# EAGLE board 24x16_RGB_ATXMega_cp (EAGLE 6.5.0), part 1 of 2
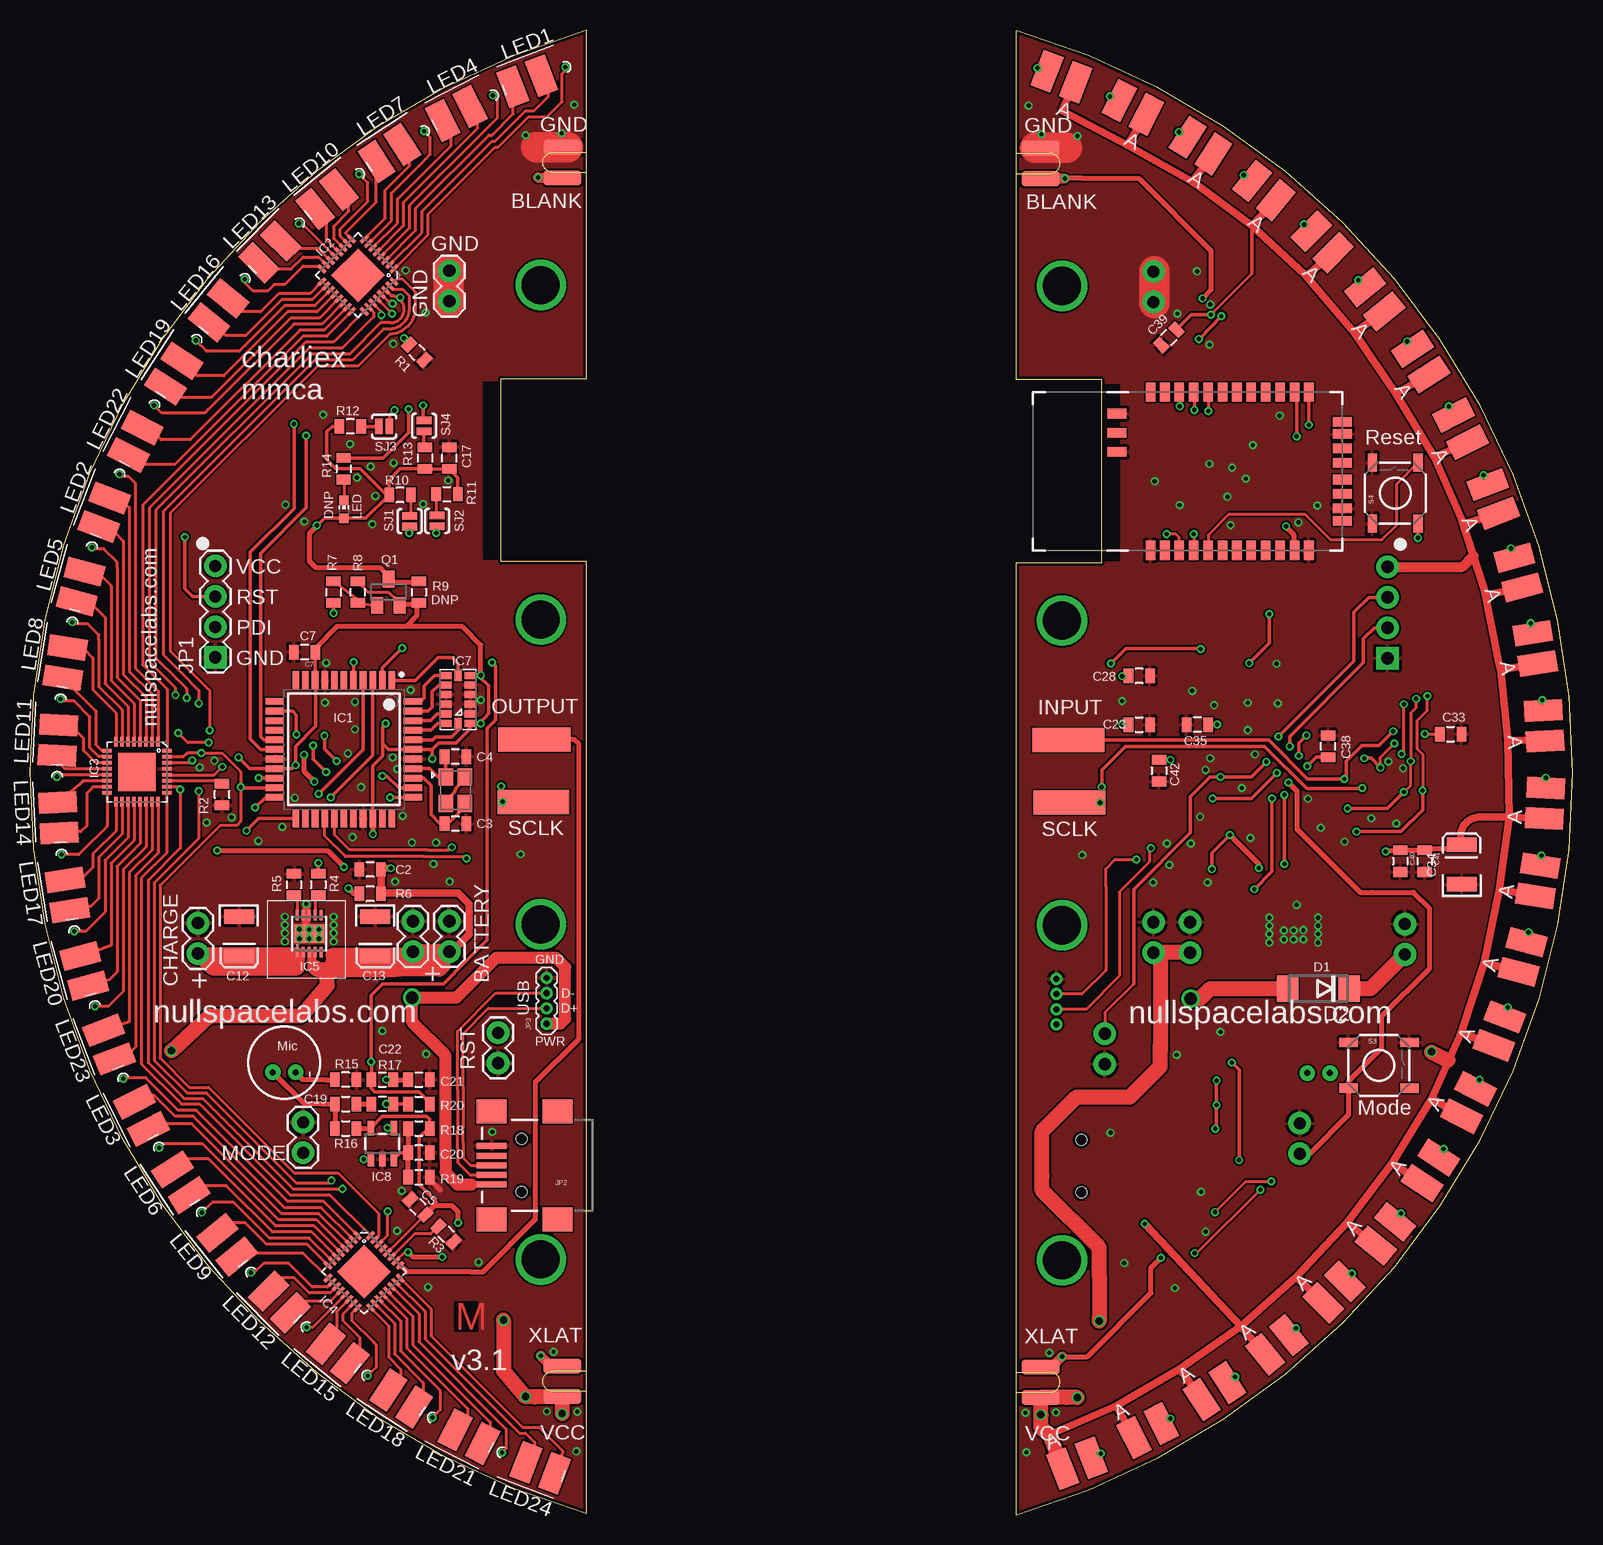
[diagram p0: board, top side]
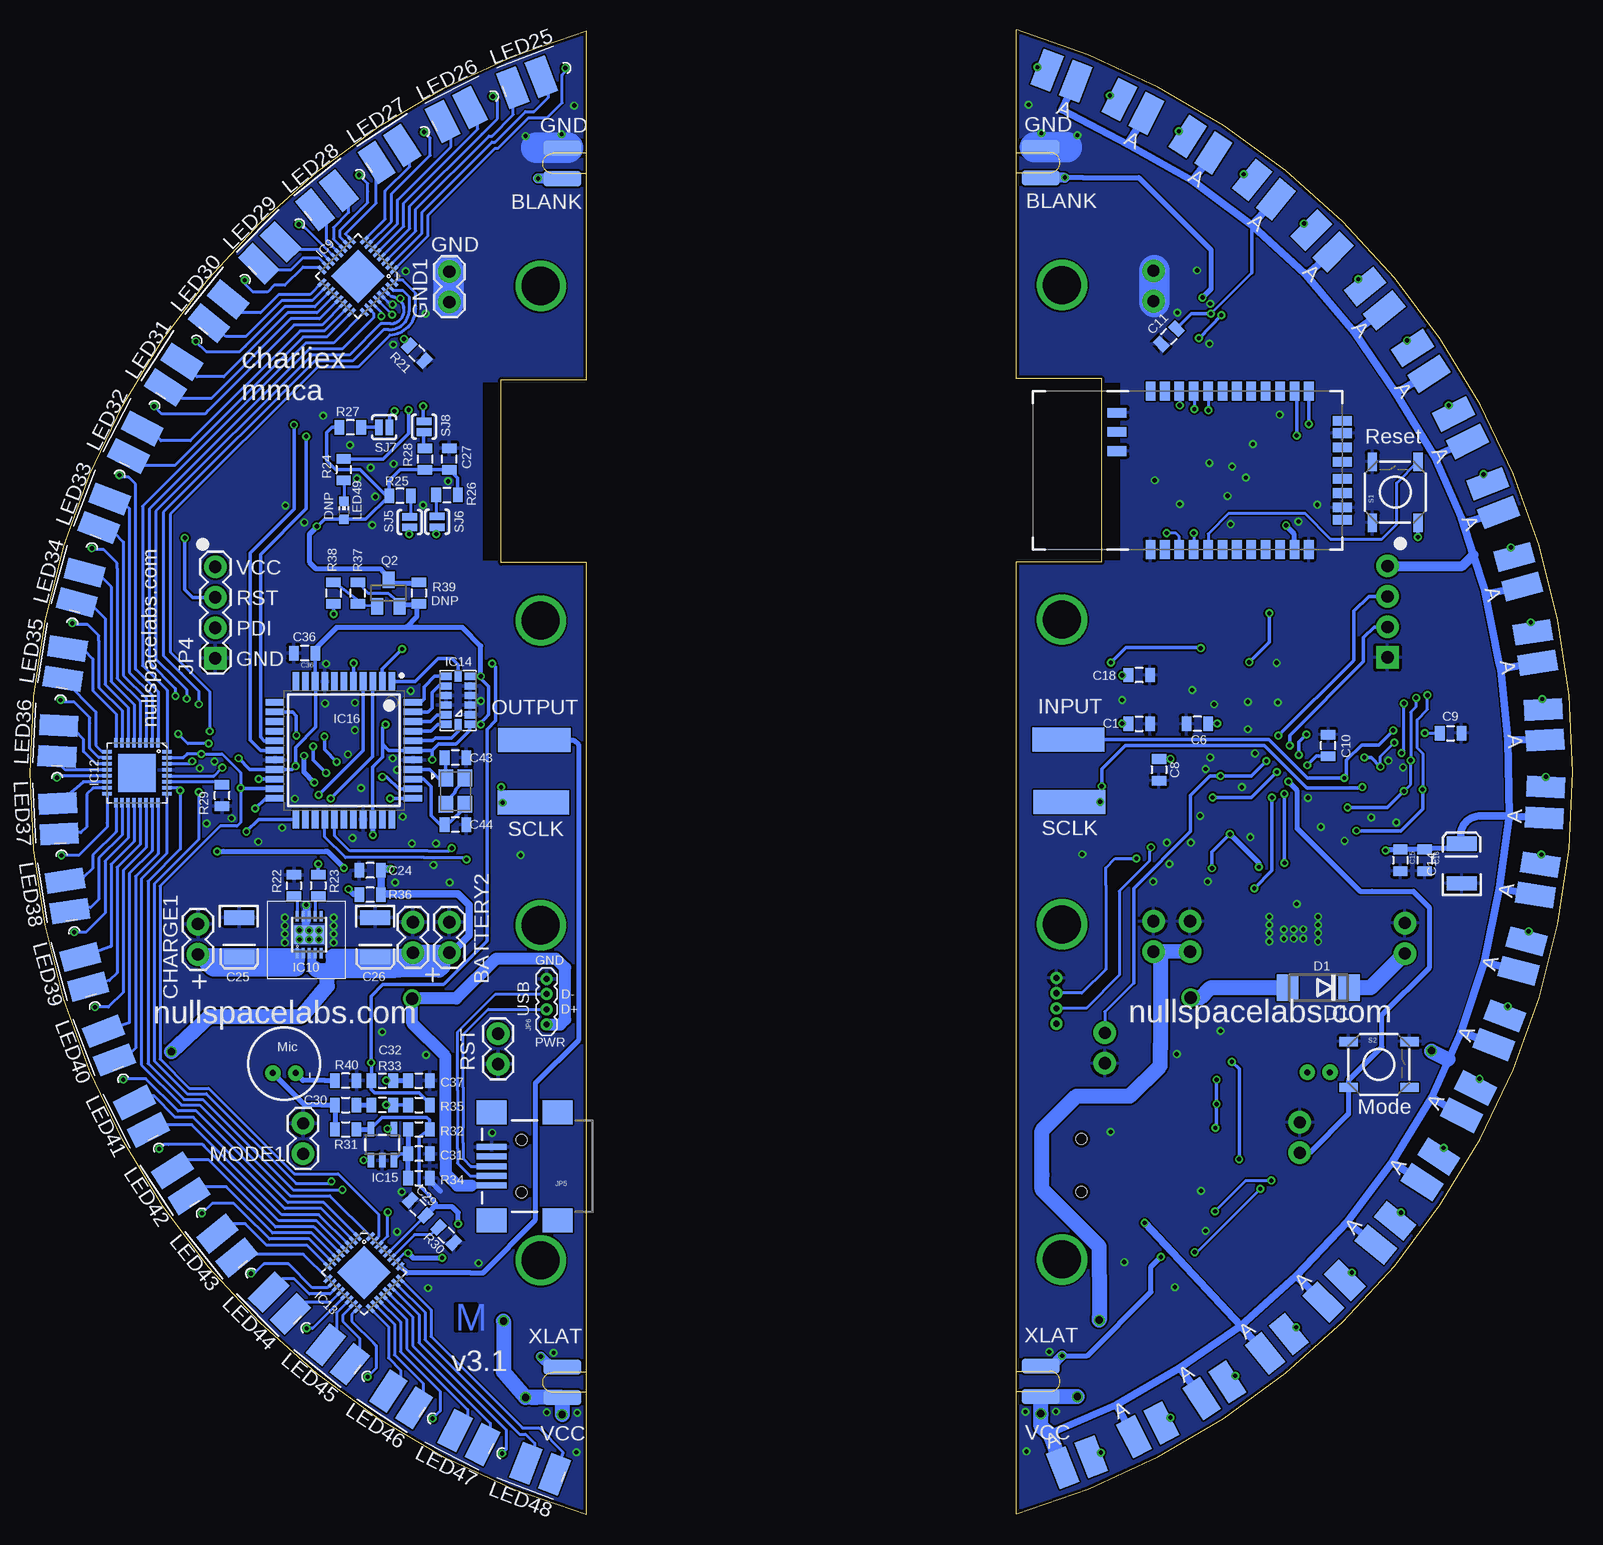
[diagram p1: board, bottom side, seen from below]

Size 128.61 x 123.77 mm. Coordinates in mm from the lower left corner, seen from the top.
Outline: 46.39,0.08 arc-147 46.39,123.77 46.39,94.69 39.27,94.69 39.27,79.45 46.39,79.45 46.39,0.08
Outline: 82.23,0 arc147 82.23,123.7 82.23,94.62 89.34,94.62 89.34,79.38 82.23,79.38 82.23,0
Copper layers (1*16): Top 0.035mm / dielectric 1.5mm / Bottom 0.035mm
Design rules "ITEADstudio_DRC": minimum track width 6mil, minimum drill 12mil, track to track 6mil, track to pad 6mil, pad to pad 6mil, via to via 6mil, smd to smd 0mil, copper to edge 10mil, drill to drill 10mil, minimum pad ring 10mil, minimum via ring 6mil, stop-mask expansion 2mil, vias tented up to drill 100mil, thermal gap 10mil

## Footprints (pad centres in the part's own frame; a part is rotated, then mirrored left to right if it is on the bottom)
1X02 = drill 1.016 pad 1.88: 1 0,0; 2 2.54,0
0805 = smd 0.8 x 1.2: 1 -0.9,0; 2 0.9,0
EIA3528 = smd 1.2 x 2.5: A 1.65,0; C -1.65,0
DO214AA = smd 1.8 x 2.2: A 2.55,0; C -2.55,0
NONOLITH_TQFP-44 = smd 1.55 x 0.55: 1 -5.75,4; 2 -5.75,3.2; 3 -5.75,2.4; 4 -5.75,1.6; 5 -5.75,0.8; 6 -5.75,0; 7 -5.75,-0.8; 8 -5.75,-1.6; 9 -5.75,-2.4; 10 -5.75,-3.2; 11 -5.75,-4; 23 5.75,-4; 24 5.75,-3.2; 25 5.75,-2.4; 26 5.75,-1.6; 27 5.75,-0.8; 28 5.75,0; 29 5.75,0.8; 30 5.75,1.6; 31 5.75,2.4; 32 5.75,3.2; 33 5.75,4 | smd 0.55 x 1.55: 12 -4,-5.75; 13 -3.2,-5.75; 14 -2.4,-5.75; 15 -1.6,-5.75; 16 -0.8,-5.75; 17 0,-5.75; 18 0.8,-5.75; 19 1.6,-5.75; 20 2.4,-5.75; 21 3.2,-5.75; 22 4,-5.75; 34 4,5.75; 35 3.2,5.75; 36 2.4,5.75; 37 1.6,5.75; 38 0.8,5.75; 39 0,5.75; 40 -0.8,5.75; 41 -1.6,5.75; 42 -2.4,5.75; 43 -3.2,5.75; 44 -4,5.75
QFN32_XLP = smd 0.285 x 0.8: 1 -1.75,-2.5; 2 -1.25,-2.5; 3 -0.75,-2.5; 4 -0.25,-2.5; 5 0.25,-2.5; 6 0.75,-2.5; 7 1.25,-2.5; 8 1.75,-2.5; 17 1.75,2.5; 18 1.25,2.5; 19 0.75,2.5; 20 0.25,2.5; 21 -0.25,2.5; 22 -0.75,2.5; 23 -1.25,2.5; 24 -1.75,2.5 | smd 0.8 x 0.285: 9 2.5,-1.75; 10 2.5,-1.25; 11 2.5,-0.75; 12 2.5,-0.25; 13 2.5,0.25; 14 2.5,0.75; 15 2.5,1.25; 16 2.5,1.75; 25 -2.5,1.75; 26 -2.5,1.25; 27 -2.5,0.75; 28 -2.5,0.25; 29 -2.5,-0.25; 30 -2.5,-0.75; 31 -2.5,-1.25; 32 -2.5,-1.75 | smd 3.15 x 3.15: EP 0,0
DFN10_3X3 = smd 0.3 x 0.85: 1 -1,-1.55; 2 -0.5,-1.55; 3 0,-1.55; 4 0.5,-1.55; 5 1,-1.55; 6 1,1.55; 7 0.5,1.55; 8 0,1.55; 9 -0.5,1.55; 10 -1,1.55 | smd 2.48 x 1.55: EXP 0,0
RN41 = smd 0.8 x 1.6: 1 -6.6,-6.6; 2 -5.4,-6.6; 3 -4.2,-6.6; 4 -3,-6.6; 5 -1.8,-6.6; 6 -0.6,-6.6; 7 0.6,-6.6; 8 1.8,-6.6; 9 3,-6.6; 10 4.2,-6.6; 11 5.4,-6.6; 12 6.6,-6.6; 13 6.6,6.6; 14 5.4,6.6; 15 4.2,6.6; 16 3,6.6; 17 1.8,6.6; 18 0.6,6.6; 19 -0.6,6.6; 20 -1.8,6.6; 21 -3,6.6; 22 -4.2,6.6; 23 -5.4,6.6; 24 -6.6,6.6 | smd 1.6 x 0.8: 25 -9.4,4.8; 26 -9.4,3.2; 27 -9.4,1.6; 28 9.4,3.1; 29 9.4,-3.1; 30 9.4,-4.122; 31 9.4,-1.9; 32 9.4,-0.7; 33 9.4,0.7; 34 9.4,1.9; 35 9.4,4.122
LGA-14 = smd 0.6 x 0.9: 1 -2,-1; 2 -1.2,-1; 3 -0.4,-1; 4 0.4,-1; 5 1.2,-1; 6 2,-1; 8 2,1; 9 1.2,1; 10 0.4,1; 11 -0.4,1; 12 -1.2,1; 13 -2,1 | smd 0.9 x 0.6: 7 2,0; 14 -2,0
SOT23-5 = smd 0.55 x 1.2: 1 -0.95,-1.3; 2 0,-1.3; 3 0.95,-1.3; 4 0.95,1.3; 5 -0.95,1.3
1X04 = drill 1.016 pad 1.88 square: 1 0,0 | drill 1.016 pad 1.88: 2 2.54,0; 3 5.08,0; 4 7.62,0
USB-MINIB = smd 2.5 x 0.5: D+ 2.5,0; D- 2.5,0.8; GND 2.5,-1.6; ID 2.5,-0.8; VBUS 2.5,1.6 | smd 2.5 x 2: MTN1 -3,4.5; MTN2 2.5,4.5; MTN3 -3,-4.5; MTN4 2.5,-4.5 | hole 0.9: 0,2.2; 0,-2.2
1X04-1.27MM = drill 0.508 pad 1: 1 0,0; 2 1.27,0; 3 2.54,0; 4 3.81,0
CHIP-LED0603 = smd 0.8 x 0.8: A 0,-0.75; C 0,0.75
LED5MM_RGB_EDGE = smd 1.75 x 3.175 bottom: A -0.585,-1.6; B 1.971,-1.6 | smd 1.75 x 3.175: G 0.693,-1.6; R -1.863,-1.6
MIC-6MM = drill 0.5 pad 1.27: 1 -0.8,0.95; 2 -0.8,-0.95
SOT23 = smd 1 x 1.4: 1 -0.95,-1.1; 2 0.95,-1.1; 3 0,1.1
TACTILE_SWITCH_SMD = smd 1.524 x 0.762: 1 -2.54,1.905; 2 2.54,1.905; 3 -2.54,-1.905; 4 2.54,-1.905
SJ_2S-NO = smd 0.635 x 1.27: 1 -0.45,0; 2 0.45,0
SLOT = smd 3.175 x 1.27: P$1 2.032,1.27; P$2 2.032,-1.27 | smd 3.175 x 1.27 bottom: P$3 2.032,1.27; P$4 2.032,-1.27
TP20SQ = smd 2 x 2: TP 0,0
NX3225GA = smd 1.4 x 1.2: 1 -1.1,-0.8; 2 1.1,-0.8; 3 1.1,0.8; 4 -1.1,0.8

## Placement (x,y rotation side)
BATTERY  [1X02]  31.91,49.48 270 top
BATTERY1  [1X02]  34.96,49.48 270 top
BATTERY2  [1X02]  96.7,49.4 270 bottom
BATTERY3  [1X02]  93.66,49.4 270 bottom
C1  .1uF  [0805]  36.15,65.94 0 bottom
C2  .1uF  [0805]  28.35,53.8 180 top
C3  10pF  [0805]  35.46,57.61 180 top
C4  10pF  [0805]  35.46,63.2 180 top
C5  .1uF  [0805]  32.34,25.66 135 top
C6  .1uF  [0805]  31.3,65.94 180 bottom
C7  .1uF  [0805]  22.89,71.91 180 top
C8  0.1uF  [0805]  34.5,62.1 270 bottom
C9  .1uF  [0805]  10.19,65.15 0 bottom
C10  .1uF  [0805]  20.4,64.13 90 bottom
C11  .1uF  [0805]  33.68,98.23 225 bottom
C12  4.7uF  [EIA3528]  17.43,48.21 270 top
C13  4.7uF  [EIA3528]  28.78,48.21 270 top
C14  47uF  [EIA3528]  9.28,54.28 90 bottom
C15  10uF  [0805]  14.38,54.56 270 bottom
C16  1uF  [0805]  12.35,54.56 270 bottom
C17  .1uF  [0805]  34.95,88.08 90 top
C18  0.1uF  [0805]  36.15,70 180 bottom
C19  4.7uF  [0805]  26.32,34.24 0 top
C20  1uF  [0805]  32.42,30.18 180 top
C21  .1uF  [0805]  32.42,36.27 0 top
C22  12pF  [0805]  29.37,36.27 0 top
C23  .1uF  [0805]  92.46,65.86 0 top
C24  .1uF  [0805]  100.26,53.72 180 bottom
C25  4.7uF  [EIA3528]  111.18,48.13 270 bottom
C26  4.7uF  [EIA3528]  99.83,48.13 270 bottom
C27  .1uF  [0805]  93.66,88.01 90 bottom
C28  0.1uF  [0805]  92.46,69.93 180 top
C29  .1uF  [0805]  96.28,25.59 135 bottom
C30  4.7uF  [0805]  102.29,34.16 0 bottom
C31  1uF  [0805]  96.2,30.1 180 bottom
C32  12pF  [0805]  99.24,36.19 0 bottom
C33  .1uF  [0805]  118.42,65.07 0 top
C34  47uF  [EIA3528]  119.34,54.2 90 top
C35  .1uF  [0805]  97.31,65.86 180 top
C36  .1uF  [0805]  105.72,71.83 180 bottom
C37  .1uF  [0805]  96.2,36.19 0 bottom
C38  .1uF  [0805]  108.21,64.06 90 top
C39  .1uF  [0805]  94.93,98.15 225 top
C40  10uF  [0805]  114.23,54.48 270 top
C41  1uF  [0805]  116.26,54.48 270 top
C42  0.1uF  [0805]  94.11,62.03 270 top
C43  10pF  [0805]  93.15,63.12 180 bottom
C44  10pF  [0805]  93.15,57.53 180 bottom
CHARGE  [1X02]  14,49.33 270 top
CHARGE1  [1X02]  114.61,49.25 270 bottom
D1  SSB44-E3/52T  [DO214AA]  21.22,43.94 180 bottom
D2  SSB44-E3/52T  [DO214AA]  107.4,43.87 180 top
GND  [1X02]  34.96,101.17 90 top
GND1  [1X02]  93.66,101.09 90 bottom
IC1  [NONOLITH_TQFP-44]  26.17,63.8 270 top
IC2  TLC5947XLP  [QFN32_XLP]  27.34,103.33 135 top
IC3  TLC5947XLP  [QFN32_XLP]  8.92,61.93 180 top
IC4  TLC5947XLP  [QFN32_XLP]  27.84,20.27 225 top
IC5  MCP73123  [DFN10_3X3]  23.27,48.44 0 top
IC6  BLUETOOTH-RN41"  [RN41]  28.61,87.07 0 bottom
IC7  MMA7455L  [LGA-14]  35.69,67.97 90 top
IC8  OPA344  [SOT23-5]  29.37,30.94 0 top
IC9  TLC5947XLP  [QFN32_XLP]  101.28,103.25 135 bottom
IC10  MCP73123  [DFN10_3X3]  105.34,48.36 0 bottom
IC11  BLUETOOTH-RN41"  [RN41]  100.01,87 0 top
IC12  TLC5947XLP  [QFN32_XLP]  119.69,61.85 180 bottom
IC13  TLC5947XLP  [QFN32_XLP]  100.77,20.19 225 bottom
IC14  MMA7455L  [LGA-14]  92.92,67.89 90 bottom
IC15  OPA344  [SOT23-5]  99.24,30.86 0 bottom
IC16  [NONOLITH_TQFP-44]  102.44,63.73 270 bottom
JP1  [1X04]  15.45,71.48 90 top
JP2  USBSMD  [USB-MINIB]  40.98,29.13 180 top
JP3  [1X04-1.27MM]  43.06,40.94 90 top
JP4  [1X04]  113.16,71.4 90 bottom
JP5  USBSMD  [USB-MINIB]  87.64,29.06 180 bottom
JP6  [1X04-1.27MM]  85.55,40.87 90 bottom
LED  [CHIP-LED0603]  26.17,83.82 0 top
LED1  GM1WA55311A5MM_RGB_EDGE  [LED5MM_RGB_EDGE]  41.41,121.21 21 top
LED2  GM1WA55311A5MM_RGB_EDGE  [LED5MM_RGB_EDGE]  4.91,84.68 69 top
LED3  GM1WA55311A5MM_RGB_EDGE  [LED5MM_RGB_EDGE]  7.59,33.1 117 top
LED4  GM1WA55311A5MM_RGB_EDGE  [LED5MM_RGB_EDGE]  35.34,118.5 27 top
LED5  GM1WA55311A5MM_RGB_EDGE  [LED5MM_RGB_EDGE]  2.83,78.36 75 top
LED6  GM1WA55311A5MM_RGB_EDGE  [LED5MM_RGB_EDGE]  10.91,27.34 123 top
LED7  GM1WA55311A5MM_RGB_EDGE  [LED5MM_RGB_EDGE]  29.58,115.18 33 top
LED8  GM1WA55311A5MM_RGB_EDGE  [LED5MM_RGB_EDGE]  1.45,71.86 81 top
LED9  GM1WA55311A5MM_RGB_EDGE  [LED5MM_RGB_EDGE]  14.82,21.96 129 top
LED10  GM1WA55311A5MM_RGB_EDGE  [LED5MM_RGB_EDGE]  24.21,111.27 39 top
LED11  GM1WA55311A5MM_RGB_EDGE  [LED5MM_RGB_EDGE]  0.75,65.25 87 top
LED12  GM1WA55311A5MM_RGB_EDGE  [LED5MM_RGB_EDGE]  19.26,17.02 135 top
LED13  GM1WA55311A5MM_RGB_EDGE  [LED5MM_RGB_EDGE]  19.26,106.83 45 top
LED14  GM1WA55311A5MM_RGB_EDGE  [LED5MM_RGB_EDGE]  0.75,58.6 93 top
LED15  GM1WA55311A5MM_RGB_EDGE  [LED5MM_RGB_EDGE]  24.21,12.58 141 top
LED16  GM1WA55311A5MM_RGB_EDGE  [LED5MM_RGB_EDGE]  14.84,101.86 51 top
LED17  GM1WA55311A5MM_RGB_EDGE  [LED5MM_RGB_EDGE]  1.45,51.99 99 top
LED18  GM1WA55311A5MM_RGB_EDGE  [LED5MM_RGB_EDGE]  29.58,8.67 147 top
LED19  GM1WA55311A5MM_RGB_EDGE  [LED5MM_RGB_EDGE]  10.96,96.48 57 top
LED20  GM1WA55311A5MM_RGB_EDGE  [LED5MM_RGB_EDGE]  2.83,45.49 105 top
LED21  GM1WA55311A5MM_RGB_EDGE  [LED5MM_RGB_EDGE]  35.34,5.35 153 top
LED22  GM1WA55311A5MM_RGB_EDGE  [LED5MM_RGB_EDGE]  7.61,90.73 63 top
LED23  GM1WA55311A5MM_RGB_EDGE  [LED5MM_RGB_EDGE]  4.88,39.17 111 top
LED24  GM1WA55311A5MM_RGB_EDGE  [LED5MM_RGB_EDGE]  41.41,2.64 159 top
LED25  GM1WA55311A5MM_RGB_EDGE  [LED5MM_RGB_EDGE]  87.2,121.13 21 bottom
LED26  GM1WA55311A5MM_RGB_EDGE  [LED5MM_RGB_EDGE]  93.28,118.43 27 bottom
LED27  GM1WA55311A5MM_RGB_EDGE  [LED5MM_RGB_EDGE]  99.03,115.11 33 bottom
LED28  GM1WA55311A5MM_RGB_EDGE  [LED5MM_RGB_EDGE]  104.41,111.2 39 bottom
LED29  GM1WA55311A5MM_RGB_EDGE  [LED5MM_RGB_EDGE]  109.35,106.75 45 bottom
LED30  GM1WA55311A5MM_RGB_EDGE  [LED5MM_RGB_EDGE]  113.77,101.79 51 bottom
LED31  GM1WA55311A5MM_RGB_EDGE  [LED5MM_RGB_EDGE]  117.65,96.41 57 bottom
LED32  GM1WA55311A5MM_RGB_EDGE  [LED5MM_RGB_EDGE]  121,90.65 63 bottom
LED33  GM1WA55311A5MM_RGB_EDGE  [LED5MM_RGB_EDGE]  123.7,84.6 69 bottom
LED34  GM1WA55311A5MM_RGB_EDGE  [LED5MM_RGB_EDGE]  125.78,78.28 75 bottom
LED35  GM1WA55311A5MM_RGB_EDGE  [LED5MM_RGB_EDGE]  127.16,71.78 81 bottom
LED36  GM1WA55311A5MM_RGB_EDGE  [LED5MM_RGB_EDGE]  127.86,65.17 87 bottom
LED37  GM1WA55311A5MM_RGB_EDGE  [LED5MM_RGB_EDGE]  127.86,58.53 93 bottom
LED38  GM1WA55311A5MM_RGB_EDGE  [LED5MM_RGB_EDGE]  127.16,51.92 99 bottom
LED39  GM1WA55311A5MM_RGB_EDGE  [LED5MM_RGB_EDGE]  125.78,45.42 105 bottom
LED40  GM1WA55311A5MM_RGB_EDGE  [LED5MM_RGB_EDGE]  123.73,39.09 111 bottom
LED41  GM1WA55311A5MM_RGB_EDGE  [LED5MM_RGB_EDGE]  121.02,33.02 117 bottom
LED42  GM1WA55311A5MM_RGB_EDGE  [LED5MM_RGB_EDGE]  117.7,27.26 123 bottom
LED43  GM1WA55311A5MM_RGB_EDGE  [LED5MM_RGB_EDGE]  113.8,21.89 129 bottom
LED44  GM1WA55311A5MM_RGB_EDGE  [LED5MM_RGB_EDGE]  109.35,16.95 135 bottom
LED45  GM1WA55311A5MM_RGB_EDGE  [LED5MM_RGB_EDGE]  104.41,12.5 141 bottom
LED46  GM1WA55311A5MM_RGB_EDGE  [LED5MM_RGB_EDGE]  99.03,8.59 147 bottom
LED47  GM1WA55311A5MM_RGB_EDGE  [LED5MM_RGB_EDGE]  93.28,5.27 153 bottom
LED48  GM1WA55311A5MM_RGB_EDGE  [LED5MM_RGB_EDGE]  87.2,2.57 159 bottom
LED49  [CHIP-LED0603]  102.44,83.74 0 bottom
MIC1  MIC6MM  [MIC-6MM]  21.19,37.69 90 top
MIC2  MIC6MM  [MIC-6MM]  107.42,37.62 90 bottom
MODE  [1X02]  22.76,32.72 270 top
MODE1  [1X02]  105.85,32.64 270 bottom
Q1  BSH201  [SOT23]  29.88,76.91 0 top
Q2  BSH201  [SOT23]  98.74,76.83 0 bottom
R1  20K  [0805]  32.24,96.91 135 top
R2  20K  [0805]  16.01,60.05 90 top
R3  20K  [0805]  34.69,23.39 135 top
R4  1K  [0805]  24.03,52.53 270 top
R5  1K  [0805]  22,52.53 270 top
R6  220K  [0805]  28.35,51.77 180 top
R7  10k  [0805]  25.3,76.91 270 top
R8  10k  [0805]  27.33,76.91 90 top
R9  0ohm DNP  [0805]  32.42,76.91 270 top
R10  1k  [0805]  30.84,85.01 180 top
R11  1k  [0805]  34.75,85.09 0 top
R12  1k  [0805]  26.7,90.73 180 top
R13  1k  [0805]  32.92,88.09 270 top
R14  220  [0805]  26.14,87.2 270 top
R15  4.7k  [0805]  26.32,36.27 180 top
R16  2.2k  [0805]  26.32,32.21 0 top
R17  10k  [0805]  29.37,34.24 180 top
R18  10k  [0805]  32.42,32.21 0 top
R19  10k  [0805]  32.42,28.14 0 top
R20  1M  [0805]  32.42,34.24 0 top
R21  20K  [0805]  96.37,96.83 135 bottom
R22  1K  [0805]  106.61,52.45 270 bottom
R23  1K  [0805]  104.58,52.45 270 bottom
R24  220  [0805]  102.47,87.12 270 bottom
R25  1k  [0805]  97.77,84.94 180 bottom
R26  1k  [0805]  93.86,85.01 0 bottom
R27  1k  [0805]  101.91,90.65 180 bottom
R28  1k  [0805]  95.69,88.01 270 bottom
R29  20K  [0805]  112.6,59.97 90 bottom
R30  20K  [0805]  93.92,23.32 135 bottom
R31  2.2k  [0805]  102.29,32.13 0 bottom
R32  10k  [0805]  96.2,32.13 0 bottom
R33  10k  [0805]  99.24,34.16 180 bottom
R34  10k  [0805]  96.2,28.07 0 bottom
R35  1M  [0805]  96.2,34.16 0 bottom
R36  220K  [0805]  100.26,51.69 180 bottom
R37  10k  [0805]  101.28,76.83 90 bottom
R38  10k  [0805]  103.31,76.83 270 bottom
R39  0ohm DNP  [0805]  96.2,76.83 270 bottom
R40  4.7k  [0805]  102.29,36.19 180 bottom
RST  [1X02]  39.02,37.64 90 top
RST1  [1X02]  89.59,37.57 90 bottom
S1  [TACTILE_SWITCH_SMD]  14.81,85.24 90 bottom
S2  [TACTILE_SWITCH_SMD]  16.16,37.54 0 bottom
S3  [TACTILE_SWITCH_SMD]  112.45,37.46 0 top
S4  [TACTILE_SWITCH_SMD]  113.8,85.17 90 top
SJ1  SOLDERJUMPERNO  [SJ_2S-NO]  31.65,82.83 90 top
SJ2  SOLDERJUMPERNO  [SJ_2S-NO]  33.94,82.85 90 top
SJ3  SOLDERJUMPERNO  [SJ_2S-NO]  29.52,90.73 180 top
SJ4  SOLDERJUMPERNO  [SJ_2S-NO]  32.85,90.78 270 top
SJ5  SOLDERJUMPERNO  [SJ_2S-NO]  96.96,82.75 90 bottom
SJ6  SOLDERJUMPERNO  [SJ_2S-NO]  94.67,82.78 90 bottom
SJ7  SOLDERJUMPERNO  [SJ_2S-NO]  99.09,90.65 180 bottom
SJ8  SOLDERJUMPERNO  [SJ_2S-NO]  95.76,90.7 270 bottom
SLOT1  SLOT  [SLOT]  46.39,11.13 180 top
SLOT2  SLOT  [SLOT]  46.39,112.73 180 top
SLOT3  SLOT  [SLOT]  82.23,11.05 180 bottom
SLOT4  SLOT  [SLOT]  82.23,112.65 180 bottom
TP1  TPTP20SQ  [TP20SQ]  42.04,64.64 0 top
TP2  TPTP20SQ  [TP20SQ]  40.04,64.64 0 top
TP3  TPTP20SQ  [TP20SQ]  41.97,59.44 0 top
TP4  TPTP20SQ  [TP20SQ]  39.99,59.44 0 bottom
TP5  TPTP20SQ  [TP20SQ]  42.04,64.64 0 bottom
TP6  TPTP20SQ  [TP20SQ]  40.04,64.64 0 bottom
TP7  TPTP20SQ  [TP20SQ]  43.97,59.44 0 bottom
TP8  TPTP20SQ  [TP20SQ]  41.99,59.44 0 bottom
TP9  TPTP20SQ  [TP20SQ]  44.05,64.64 0 top
TP10  TPTP20SQ  [TP20SQ]  39.99,59.44 0 top
TP11  TPTP20SQ  [TP20SQ]  44.05,64.64 0 bottom
TP12  TPTP20SQ  [TP20SQ]  43.95,59.44 0 top
TP13  TPTP20SQ  [TP20SQ]  86.57,64.57 0 bottom
TP14  TPTP20SQ  [TP20SQ]  88.58,64.57 0 bottom
TP15  TPTP20SQ  [TP20SQ]  86.65,59.36 0 bottom
TP16  TPTP20SQ  [TP20SQ]  88.63,59.36 0 top
TP17  TPTP20SQ  [TP20SQ]  86.57,64.57 0 top
TP18  TPTP20SQ  [TP20SQ]  88.58,64.57 0 top
TP19  TPTP20SQ  [TP20SQ]  84.64,59.36 0 top
TP20  TPTP20SQ  [TP20SQ]  86.62,59.36 0 top
TP21  TPTP20SQ  [TP20SQ]  84.56,64.57 0 bottom
TP22  TPTP20SQ  [TP20SQ]  88.63,59.36 0 bottom
TP23  TPTP20SQ  [TP20SQ]  84.56,64.57 0 top
TP24  TPTP20SQ  [TP20SQ]  84.66,59.36 0 bottom
X1  NX3225GA XC1972CT-ND  [NX3225GA]  35.46,60.4 270 top
X2  NX3225GA XC1972CT-ND  [NX3225GA]  93.15,60.32 270 bottom

## Library data of the parts
BATTERY BATTERY1-BATTERY3 CHARGE CHARGE1 GND GND1 R7-R9 R14 R17-R20 R24 R32-R35 R37-R39 S1-S4 SJ1-SJ8 = SparkFun; OC_NEWARK: unknown
C1 C2 C5-C7 C9-C11 C23 C24 C29 C33 C35 C36 C38 C39 = slice_noshift; MPN: 08055C105MAT2A; OC_NEWARK: 73T5385
C3 C4 C8 C42-C44 = SparkFun
C12 C13 C25 C26 = slice_noshift; MPN: 0805YD475KAT2A; OC_NEWARK: 96M1306
C14 C34 IC2-IC4 IC9 IC12 IC13 MIC1 MIC2 R5 R22 = slice_noshift; OC_NEWARK: unknown
C15 C16 C40 C41 = 24x16_RGB; MPN: 08055D105KAT2A; OC_NEWARK: 66M3779
C17 C21 C27 C37 = SparkFun; MPN: 08055C105MAT2A; OC_NEWARK: 73T5385
C18 C28 = SparkFun; MPN: 08055C104K4T2A; OC_NEWARK: 95W2729
C19 C30 = SparkFun; MPN: 08053D475KAT2A; OC_NEWARK: 15P4053
C20 C31 = SparkFun; MPN: 08055D105KAT2A; OC_NEWARK: 66M3779
C22 C32 = SparkFun; MF: AVX CORPORATION; MPN: 08055A120JAT2A; OC_NEWARK: 30H0781
D1 D2 = diode
IC1 IC16 = Outline
IC5 IC10 = 24x16_RGB; MPN: MCP73123T-22SI/MF; OC_NEWARK: 14R8877
IC6 IC11 = NSL_Mini_Quad; OC_NEWARK: unknown
IC7 IC14 = MMA7455Lbreakoutboard-v1a; MPN: MMA7455LR2; OC_NEWARK: 69M3900
IC8 IC15 = SparkFun; MPN: OPA344NA/250G4; OC_NEWARK: 13M5179
JP1-JP6 = SparkFun-Connectors
LED LED49 = led; OC_NEWARK: unknown
LED1-LED48 MODE MODE1 R1-R3 R21 R29 R30 RST RST1 = 24x16_RGB; OC_NEWARK: unknown
Q1 Q2 = transistor-small-signal; MPN: BSH201,215; OC_NEWARK: 79R1832
R4 R23 = slice_noshift; MF: VISHAY/DALE; MPN: CRCW08051K00FKEA; OC_NEWARK: 52K9723
R6 R36 = slice_noshift; MPN: 08051A220KAT2A; OC_NEWARK: 96M1330
R10-R13 R25-R28 = SparkFun; MF: VISHAY/DALE; MPN: CRCW08051K00FKTA; OC_NEWARK: 05F1507
R15 R40 = SparkFun; MPN: CRCW08054K70FKEA; OC_NEWARK: 61M5491
R16 R31 = SparkFun; MPN: CRCW08052K20FKEA; OC_NEWARK: 61M5457
SLOT1-SLOT4 = slice; OC_NEWARK: unknown
TP1-TP24 = testpad; OC_NEWARK: unknown
X1 X2 = M6-RF315

## Nets
!CS: IC1.1 IC7.7
!CS1: IC14.7 IC16.1
BATTSENSE: IC1.3 R6.2
BATTSENSE1: IC16.3 R36.2
BLANK: IC1.22 IC2.30 IC3.30 IC4.30 SLOT2.P$1 SLOT2.P$3
BLANK1: IC9.30 IC12.30 IC13.30 IC16.22 SLOT4.P$1 SLOT4.P$3
BT_PWR: IC1.5 R7.2
BT_PWR1: IC16.5 R38.2
BT_RST: IC6.5 S1.4
BT_RST1: IC11.5 S4.4
BUTTON: IC1.13 MODE.2 S2.3
BUTTON1: IC16.13 MODE1.2 S3.3
CHARGE: C12.A CHARGE.2 D1.C IC5.1 IC5.2
CHARGE1: C25.A CHARGE1.2 D2.C IC10.1 IC10.2
COL1: IC2.1 LED1.B
COL2: IC2.2 LED1.G
COL3: IC2.3 LED1.R
COL4: IC2.4 LED4.B
COL5: IC2.5 LED4.G
COL6: IC2.6 LED4.R
COL7: IC2.7 LED7.B
COL8: IC2.8 LED7.G
COL9: IC2.9 LED7.R
COL10: IC2.10 LED10.B
COL11: IC2.11 LED10.G
COL12: IC2.12 LED10.R
COL13: IC2.13 LED13.B
COL14: IC2.14 LED13.G
COL15: IC2.15 LED13.R
COL16: IC2.16 LED16.B
COL17: IC2.17 LED16.G
COL18: IC2.18 LED16.R
COL19: IC2.19 LED19.B
COL20: IC2.20 LED19.G
COL21: IC2.21 LED19.R
COL22: IC2.22 LED22.B
COL23: IC2.23 LED22.G
COL24: IC2.24 LED22.R
COL25: IC3.1 LED2.B
COL26: IC3.2 LED2.G
COL27: IC3.3 LED2.R
COL28: IC3.4 LED5.B
COL29: IC3.5 LED5.G
COL30: IC3.6 LED5.R
COL31: IC3.7 LED8.B
COL32: IC3.8 LED8.G
COL33: IC3.9 LED8.R
COL34: IC3.10 LED11.B
COL35: IC3.11 LED11.G
COL36: IC3.12 LED11.R
COL37: IC3.13 LED14.B
COL38: IC3.14 LED14.G
COL39: IC3.15 LED14.R
COL40: IC3.16 LED17.B
COL41: IC3.17 LED17.G
COL42: IC3.18 LED17.R
COL43: IC3.19 LED20.B
COL44: IC3.20 LED20.G
COL45: IC3.21 LED20.R
COL46: IC3.22 LED23.B
COL47: IC3.23 LED23.G
COL48: IC3.24 LED23.R
COL49: IC4.1 LED3.B
COL50: IC4.2 LED3.G
COL51: IC4.3 LED3.R
COL52: IC4.4 LED6.B
COL53: IC4.5 LED6.G
COL54: IC4.6 LED6.R
COL55: IC4.7 LED9.B
COL56: IC4.8 LED9.G
COL57: IC4.9 LED9.R
COL58: IC4.10 LED12.B
COL59: IC4.11 LED12.G
COL60: IC4.12 LED12.R
COL61: IC4.13 LED15.B
COL62: IC4.14 LED15.G
COL63: IC4.15 LED15.R
COL64: IC4.16 LED18.B
COL65: IC4.17 LED18.G
COL66: IC4.18 LED18.R
COL67: IC4.19 LED21.B
COL68: IC4.20 LED21.G
COL69: IC4.21 LED21.R
COL70: IC4.22 LED24.B
COL71: IC4.23 LED24.G
COL72: IC4.24 LED24.R
COL73: IC9.2 LED25.G
COL74: IC9.4 LED26.B
COL75: IC9.5 LED26.G
COL76: IC9.7 LED27.B
COL77: IC9.8 LED27.G
COL78: IC9.10 LED28.B
COL79: IC9.11 LED28.G
COL80: IC9.13 LED29.B
COL81: IC9.14 LED29.G
COL82: IC9.17 LED30.G
COL83: IC9.19 LED31.B
COL84: IC9.20 LED31.G
COL85: IC9.23 LED32.G
COL86: IC9.22 LED32.B
COL87: IC9.16 LED30.B
COL88: IC9.1 LED25.B
COL89: IC9.3 LED25.R
COL90: IC9.6 LED26.R
COL91: IC9.9 LED27.R
COL92: IC9.12 LED28.R
COL93: IC9.15 LED29.R
COL94: IC9.18 LED30.R
COL95: IC9.21 LED31.R
COL96: IC9.24 LED32.R
COL97: IC12.3 LED33.R
COL98: IC12.1 LED33.B
COL99: IC12.2 LED33.G
COL100: IC12.4 LED34.B
COL101: IC12.5 LED34.G
COL102: IC12.6 LED34.R
COL103: IC12.7 LED35.B
COL104: IC12.8 LED35.G
COL105: IC12.9 LED35.R
COL106: IC12.10 LED36.B
COL107: IC12.11 LED36.G
COL108: IC12.12 LED36.R
COL109: IC12.13 LED37.B
COL110: IC12.14 LED37.G
COL111: IC12.15 LED37.R
COL112: IC12.16 LED38.B
COL113: IC12.17 LED38.G
COL114: IC12.18 LED38.R
COL115: IC12.19 LED39.B
COL116: IC12.20 LED39.G
COL117: IC12.21 LED39.R
COL118: IC12.22 LED40.B
COL119: IC12.23 LED40.G
COL120: IC12.24 LED40.R
COL121: IC13.1 LED41.B
COL122: IC13.2 LED41.G
COL123: IC13.4 LED42.B
COL124: IC13.3 LED41.R
COL125: IC13.5 LED42.G
COL126: IC13.6 LED42.R
COL127: IC13.7 LED43.B
COL128: IC13.8 LED43.G
COL129: IC13.9 LED43.R
COL130: IC13.10 LED44.B
COL131: IC13.11 LED44.G
COL132: IC13.12 LED44.R
COL133: IC13.13 LED45.B
COL134: IC13.14 LED45.G
COL135: IC13.15 LED45.R
COL136: IC13.16 LED46.B
COL137: IC13.17 LED46.G
COL138: IC13.18 LED46.R
COL139: IC13.19 LED47.B
COL140: IC13.20 LED47.G
COL141: IC13.21 LED47.R
COL142: IC13.22 LED48.B
COL143: IC13.23 LED48.G
COL144: IC13.24 LED48.R
D+: IC1.27 JP2.D+ JP3.2
D+1: IC16.27 JP5.D+ JP6.2
D-: IC1.26 JP2.D- JP3.3
D-1: IC16.26 JP5.D- JP6.3
DAT: IC1.34 JP1.2
DAT1: IC16.34 JP4.2
DGND: X1.2 X1.4
DGND1: X2.2 X2.4
GND: BATTERY1.1 BATTERY.1 C1.2 C2.2 C3.1 C4.1 C5.2 C6.2 C7.2 C8.2 C9.2 C10.2 C11.2 C12.C C13.C C14.C C15.2 C16.2 C17.2 C18.1 C20.1 C21.2 CHARGE.1 GND.1 GND.2 IC1.8 IC1.18 IC1.30 IC1.38 IC2.29 IC3.29 IC4.29 IC5.8 IC5.9 IC5.EXP IC6.1 IC6.12 IC6.25 IC6.27 IC6.28 IC6.29 IC7.2 IC7.3 IC7.4 IC7.5 IC7.10 IC7.11 IC8.2 JP1.1 JP2.GND JP3.4 MODE.1 R1.1 R2.1 R3.1 R5.1 R15.1 R19.2 RST.1 S1.1 S1.2 S2.1 S2.2 SLOT2.P$2 SLOT2.P$4
GND1: BATTERY2.1 BATTERY3.1 C23.2 C24.2 C25.C C26.C C27.2 C28.1 C29.2 C31.1 C33.2 C34.C C35.2 C36.2 C37.2 C38.2 C39.2 C40.2 C41.2 C42.2 C43.1 C44.1 CHARGE1.1 GND1.1 GND1.2 IC9.29 IC10.8 IC10.9 IC10.EXP IC11.1 IC11.12 IC11.25 IC11.27 IC11.28 IC11.29 IC12.29 IC13.29 IC14.2 IC14.3 IC14.4 IC14.5 IC14.10 IC14.11 IC15.2 IC16.8 IC16.18 IC16.30 IC16.38 JP4.1 JP5.GND JP6.4 MODE1.1 R21.1 R22.1 R29.1 R30.1 R34.2 R40.1 RST1.1 S3.1 S3.2 S4.1 S4.2 SLOT4.P$2 SLOT4.P$4
HOLE: IC2.27 R1.2
HOLE1: IC9.27 R21.2
INT1: IC14.9 IC16.43
INT1/DRDY: IC1.44 IC7.8
INT1/DRDY1: IC14.8 IC16.44
INT2: IC1.43 IC7.9
MIC: C22.1 IC1.2 IC8.1 R20.2
MIC1: C32.1 IC15.1 IC16.2 R35.2
N$1: IC5.7 R4.2
N$2: IC3.27 R2.2
N$3: IC2.25 IC3.32
N$4: LED.C R14.2
N$5: R10.1 SJ1.2
N$6: IC5.10 R5.2
N$7: D1.A JP2.VBUS JP3.1
N$8: IC10.10 R22.2
N$9: IC4.27 R3.2
N$14: C19.2 R17.2
N$15: C19.1 MIC1.1 R16.1
N$16: C20.2 IC8.3 R18.1 R19.1
N$17: C21.1 C22.2 IC8.4 R17.1 R20.1
N$18: Q1.1 R7.1 R8.1
N$19: IC3.25 IC4.32
N$20: MIC1.2 R15.2
N$21: R12.1 SJ3.2
N$22: IC10.7 R23.2
N$23: R11.1 SJ2.2
N$24: R13.1 SJ4.2
N$25: LED49.C R24.2
N$26: R27.1 SJ7.2
N$27: R25.1 SJ5.2
N$28: R26.1 SJ6.2
N$29: R28.1 SJ8.2
N$30: IC12.27 R29.2
N$31: IC9.25 IC12.32
N$32: IC13.27 R30.2
N$36: C3.2 IC1.36 X1.3
N$37: C4.2 IC1.37 X1.1
N$39: C30.2 R33.2
N$40: C30.1 MIC2.1 R31.1
N$41: C31.2 IC15.3 R32.1 R34.1
N$42: C32.2 C37.1 IC15.4 R33.1 R35.1
N$43: Q2.1 R37.1 R38.1
N$44: IC12.25 IC13.32
N$45: MIC2.2 R40.2
N$46: C44.2 IC16.36 X2.3
N$47: C43.2 IC16.37 X2.1
N$48: D2.A JP5.VBUS JP6.1
PIO1: IC11.21 R24.1
PIO2: IC11.22 SJ8.1
PIO3: IC6.20 SJ3.1
PIO4: IC6.22 SJ4.1
PIO5: IC6.21 R14.1
PIO6: IC6.3 SJ2.1
PIO7: IC6.4 SJ1.1
PIO8: IC11.3 SJ6.1
PIO9: IC11.4 SJ5.1
PIO10: IC11.20 SJ7.1
RST: IC1.35 JP1.3 RST.2 S1.3
RST1: IC16.35 JP4.3 RST1.2 S4.3
RX: IC1.16 IC6.14
RX1: IC11.14 IC16.16
SCL/SPC: IC1.41 IC7.13
SCL/SPC1: IC14.13 IC16.41
SCLK: IC1.21 IC2.31 IC3.31 IC4.31 TP3.TP TP4.TP TP7.TP TP8.TP TP10.TP TP12.TP
SCLK1: IC9.31 IC12.31 IC13.31 IC16.21 TP15.TP TP16.TP TP19.TP TP20.TP TP22.TP TP24.TP
SDA/SDI/SDO: IC1.42 IC7.12
SDA/SDI/SDO1: IC14.12 IC16.42
SDO: IC1.40 IC7.14
SDO1: IC14.14 IC16.40
SIN: IC1.20 IC2.32 TP5.TP TP6.TP TP11.TP
SIN1: IC9.32 IC16.20 TP17.TP TP18.TP TP23.TP
SOUT: IC4.25 TP1.TP TP2.TP TP9.TP
SOUT1: IC13.25 TP13.TP TP14.TP TP21.TP
STAT: IC1.4 R4.1
STAT1: IC16.4 R23.1
TX: IC1.17 IC6.13
TX1: IC11.13 IC16.17
VCC: BATTERY1.2 BATTERY.2 C1.1 C2.1 C5.1 C6.1 C7.1 C8.1 C9.1 C10.1 C11.1 C13.A C14.A C15.1 C16.1 C18.2 IC1.9 IC1.19 IC1.31 IC1.39 IC2.28 IC3.28 IC4.28 IC5.3 IC5.4 IC7.1 IC7.6 IC8.5 JP1.4 LED1.A LED2.A LED3.A LED4.A LED5.A LED6.A LED7.A LED8.A LED9.A LED10.A LED11.A LED12.A LED13.A LED14.A LED15.A LED16.A LED17.A LED18.A LED19.A LED20.A LED21.A LED22.A LED23.A LED24.A Q1.2 R6.1 R8.2 R9.2 R16.2 R18.2 SLOT1.P$1 SLOT1.P$3
VCC1: BATTERY2.2 BATTERY3.2 C23.1 C24.1 C26.A C28.2 C29.1 C33.1 C34.A C35.1 C36.1 C38.1 C39.1 C40.1 C41.1 C42.1 IC9.28 IC10.3 IC10.4 IC12.28 IC13.28 IC14.1 IC14.6 IC15.5 IC16.9 IC16.19 IC16.31 IC16.39 JP4.4 LED25.A LED26.A LED27.A LED28.A LED29.A LED30.A LED31.A LED32.A LED33.A LED34.A LED35.A LED36.A LED37.A LED38.A LED39.A LED40.A LED41.A LED42.A LED43.A LED44.A LED45.A LED46.A LED47.A LED48.A Q2.2 R31.2 R32.2 R36.1 R37.2 R39.2 SLOT3.P$1 SLOT3.P$3
VDD: C17.1 IC6.11 LED.A Q1.3 R9.1 R10.2 R11.2 R12.2 R13.2
VDD1: C27.1 IC11.11 LED49.A Q2.3 R25.2 R26.2 R27.2 R28.2 R39.1
XLAT: IC1.23 IC2.26 IC3.26 IC4.26 SLOT1.P$2 SLOT1.P$4
XLAT1: IC9.26 IC12.26 IC13.26 IC16.23 SLOT3.P$2 SLOT3.P$4

## Tracks (layer width: path | path; a pad name or v marks a point on that pad's centre or on a via)
!CS
  Top 0.305: IC7.7 35.67,70 35.67,70.97 35.19,71.45 34.02,71.45 32.12,69.56 IC1.1
!CS1
  Bottom 0.305: IC14.7 92.94,69.92 92.94,70.89 93.43,71.37 94.6,71.37 96.49,69.48 IC16.1
BATTSENSE  (via drill 0.36)
  Top 0.305: v25.08,59.79 28.57,63.28 IC1.3
  Top 0.406: R6.2 27.01,51.77 v26.55,52.22
  Bottom 0.305: v26.55,52.22 25.08,53.7 v25.08,59.79
BATTSENSE1  (via drill 0.36)
  Top 0.305: v102.06,52.15 103.54,53.62 v103.54,59.72
  Bottom 0.305: v103.54,59.72 100.04,63.21 IC16.3
  Bottom 0.406: R36.2 101.61,51.69 v102.06,52.15
BLANK  (via drill 0.36)
  Top 0.254: v13.52,62.89 13.4,62.68 IC3.30 | v25.13,27.86 24.95,27.69 22.18,27.69 14.69,35.18 13.09,35.18 10.37,37.9 10.37,52.68 14.08,56.39 v14.08,60.33 | 30.1,101.63 30.11,101.63 arc-177 30.05,99.37 29.24,99.37 26.63,96.75 23.5,96.75 10.5,83.74 10.5,71.43 12.22,69.7 13.06,68.86 v13.06,68.1 | 30.1,101.63 IC2.30 | 30.1,101.63 30.1,101.64 v30.87,101.47 | 44.33,111.48 SLOT2.P$3 | IC4.30 29.83,23.31 v29.83,25.3
  Top 0.305: IC1.22 19.63,59.81 v18.78,58.95
  Top 0.813: v42.35,111.48 44.33,111.48
  Bottom 0.254: v42.35,111.48 42.37,111.46 | v13.06,68.1 13.06,67.36 13.52,66.9 v13.52,62.89 13.52,60.88 v14.08,60.33 | v29.83,25.3 27.26,27.86 v25.13,27.86
  Bottom 0.305: v18.78,58.95 15.45,58.95 v14.08,60.33
  Bottom 0.406: v42.35,111.48 40.87,111.48 36.18,111.48 30.16,105.46 30.16,102.18 v30.87,101.47
  Bottom 0.813: 42.37,111.46 SLOT2.P$3
BLANK1  (via drill 0.36)
  Top 0.254: v86.26,111.4 86.24,111.38 | v115.55,68.02 115.55,67.28 115.09,66.83 v115.09,62.81 115.09,60.81 v114.53,60.25 | v98.79,25.22 101.35,27.79 v103.49,27.79
  Top 0.305: v109.84,58.88 113.16,58.88 v114.53,60.25
  Top 0.406: v86.26,111.4 87.74,111.4 92.44,111.4 98.46,105.38 98.46,102.11 v97.75,101.4
  Top 0.813: 86.24,111.38 SLOT4.P$3
  Bottom 0.254: v115.09,62.81 115.21,62.6 IC12.30 | v103.49,27.79 103.66,27.61 106.43,27.61 113.93,35.1 115.53,35.1 118.24,37.82 118.24,52.6 114.53,56.31 v114.53,60.25 | 98.51,101.55 98.51,101.55 arc177 98.56,99.29 99.37,99.29 101.99,96.67 105.11,96.67 118.12,83.67 118.12,71.35 116.39,69.62 115.55,68.78 v115.55,68.02 | 98.51,101.55 IC9.30 | 98.51,101.55 98.51,101.57 v97.75,101.4 | 84.28,111.4 SLOT4.P$3 | IC13.30 98.79,23.24 v98.79,25.22
  Bottom 0.305: IC16.22 108.98,59.73 v109.84,58.88
  Bottom 0.813: v86.26,111.4 84.28,111.4
BT_PWR  (via drill 0.36)
  Top 0.305: v26.98,71.07 v26.97,71.06 IC1.5 | R7.2 v25.3,75.16
  Bottom 0.305: v25.3,75.16 25.3,72.75 v26.98,71.07
BT_PWR1  (via drill 0.36)
  Top 0.305: v103.31,75.08 103.31,72.67 v101.63,70.99
  Bottom 0.305: v101.63,70.99 101.64,70.98 IC16.5 | R38.2 v103.31,75.08
BT_RST
  Bottom 0.254: S1.4 14.69,86 14.69,82.58 15.91,81.36 20.2,81.36 22.33,83.49 28.66,83.49 30.38,81.76 30.38,80.49
  Bottom 0.305: 30.38,80.49 IC6.5
BT_RST1
  Top 0.254: S4.4 113.93,85.93 113.93,82.5 112.71,81.28 108.41,81.28 106.28,83.41 99.96,83.41 98.23,81.69 98.23,80.42
  Top 0.305: 98.23,80.42 IC11.5
BUTTON  (via drill 0.36)
  Top 0.305: IC1.13 21.88,67.01 22.21,66.68 v22.21,65.05
  Top 0.406: v23.7,61.11 22.84,61.98 v22.84,63.35
  Bottom 0.254: 18.65,35.53 S2.3
  Bottom 0.305: v22.84,63.35 22.84,64.41 v22.21,65.05
  Bottom 0.406: MODE.2 21.93,30.18 18.7,33.4 S2.3 18.7,36.2 15.91,38.99 15.91,41.66 11.97,45.59 11.97,50.65 13.29,51.97 16.74,51.97 17.74,51.97 22.23,56.46 22.97,57.2 22.97,60.38 v23.7,61.11
BUTTON1  (via drill 0.36)
  Top 0.254: 109.96,35.46 S3.3
  Top 0.305: v105.77,63.27 105.77,64.34 v106.41,64.97
  Top 0.406: MODE1.2 106.69,30.1 109.91,33.33 S3.3 109.91,36.12 112.71,38.91 112.71,41.58 116.64,45.52 116.64,50.57 115.32,51.89 111.87,51.89 110.88,51.89 106.38,56.39 105.64,57.12 105.64,60.3 v104.91,61.04
  Bottom 0.305: IC16.13 106.74,66.93 106.41,66.6 v106.41,64.97
  Bottom 0.406: v104.91,61.04 105.77,61.9 v105.77,63.27
CHARGE
  Top 0.254: IC5.1 21.92,46.53 21.82,46.53 | 21.82,46.53 C12.A | 22.13,47.14 22.82,47.14 22.82,46.53 21.82,46.53 | 21.82,46.53 21.82,46.63
  Top 0.305: IC5.2 IC5.1 22.27,46.81
  Top 0.813: 22.17,46.79 IC5.1
  Top 1.27: CHARGE.2 15.2,45.59 22.28,45.59 22.28,46.33 21.95,46.66 14.33,46.66 14.43,46.56 C12.A
  Bottom 1.016: 14,46.56 CHARGE.2
  Bottom 1.27: D1.C 16.85,43.94 CHARGE.2
CHARGE1
  Top 1.016: 114.61,46.48 CHARGE1.2
  Top 1.27: D2.C 111.77,43.87 CHARGE1.2
  Bottom 0.254: IC10.1 106.69,46.46 106.79,46.46 | 106.79,46.46 C25.A | 106.48,47.07 105.8,47.07 105.8,46.46 106.79,46.46 | 106.79,46.46 106.79,46.56
  Bottom 0.305: IC10.2 IC10.1 106.34,46.74
  Bottom 0.813: 106.44,46.71 IC10.1
  Bottom 1.27: CHARGE1.2 113.42,45.52 106.33,45.52 106.33,46.25 106.66,46.58 114.28,46.58 114.18,46.48 C25.A
COL1  (via drill 0.36)
  Top 0.254: IC2.1 33.18,106.69 33.18,108.41 38.77,114 39.02,114 41.56,116.54 42.83,116.54 43.11,116.54 44.35,117.78 44.35,120.12 44.63,120.4 v44.63,120.68
  Bottom 0.305: LED1.B 44.1,120.15 v44.63,120.68
COL2
  Top 0.254: IC2.2 32.67,106.89 32.67,108.66 38.51,114.5 38.77,114.5 41.31,117.04 42.02,117.04 43.21,118.24 43.21,119.38 LED1.G
COL3
  Top 0.254: IC2.3 32.16,107.09 32.16,108.92 38.26,115.01 38.51,115.01 40.29,116.79 40.29,118.82 LED1.R
COL4  (via drill 0.36)
  Top 0.254: IC2.4 31.65,107.29 31.65,109.17 37.67,115.16 38.97,116.46 38.97,117.68 38.97,117.93 v38.59,118.31
  Bottom 0.254: LED4.B arc-90 38.46,117.33 38.46,118.19 v38.59,118.31
COL5
  Top 0.254: IC2.5 31.15,107.49 31.15,109.42 37.32,115.6 37.32,116.23 36.68,116.87 LED4.G
COL6
  Top 0.254: IC2.6 30.64,107.69 30.64,109.68 35.08,114.12 35.08,115.04 34.4,115.72 LED4.R
COL7  (via drill 0.36)
  Top 0.254: IC2.7 30.13,107.89 30.13,110.19 32.92,112.98 33.36,113.41 33.36,114.83 v32.85,115.34
  Bottom 0.254: LED7.B 32.11,114.43 v32.85,115.34
COL8
  Top 0.254: IC2.8 29.62,108.09 29.62,110.44 31.65,112.47 31.65,113.13 31.5,113.28 31.5,113.75 LED7.G
COL9
  Top 0.254: IC2.9 26.32,106.82 26.32,106.88 28.86,109.42 28.86,112.47 LED7.R
COL10  (via drill 0.36)
  Top 0.254: IC2.10 25.81,106.62 25.81,107.14 27.59,108.92 28.15,109.47 28.15,110.39 28.15,111.05 v27.44,111.76
  Bottom 0.254: 26.74,110.96 LED10.B 26.95,111.27 v27.44,111.76 27.59,110.11
COL11
  Top 0.254: IC2.11 25.3,106.42 25.3,107.39 26.57,108.66 26.57,109.17 25.51,110.23 LED10.G
COL12
  Top 0.254: IC2.12 24.72,106.3 24.72,107.9 LED10.R
COL13  (via drill 0.36)
  Top 0.254: IC2.13 22.92,107.39 v22.41,107.65
  Bottom 0.254: LED13.B v22.41,107.65
COL14
  Top 0.254: IC2.14 24.07,105.54 21.9,105.54 21.25,106.19 LED13.G
COL15
  Top 0.254: IC2.15 24.04,104.85 22.76,104.85 21.75,103.84 20.05,103.84 19.5,104.38 LED13.R
COL16  (via drill 0.36)
  Top 0.254: IC2.16 24.1,104.09 22.76,104.09 21.24,102.57 20.35,102.57 19.79,102.01 18.6,102.01 17.89,102.72 v17.89,103
  Bottom 0.254: LED16.B 17.51,102.39 v17.89,103
COL17
  Top 0.254: IC2.17 23.34,101.8 20.73,101.8 19.21,100.28 17.43,100.28 16.53,101.18 LED16.G
COL18
  Top 0.254: IC2.18 23.54,101.3 20.99,101.3 17.99,98.3 16.31,98.3 15.2,99.41 LED16.R
COL19  (via drill 0.36)
  Top 0.254: IC2.19 23.74,100.79 21.24,100.79 17.94,97.49 17.46,97 15.27,97 14.71,97 v13.82,97.89
  Bottom 0.254: LED19.B 13.6,97.49 v13.82,97.89
COL20
  Top 0.254: IC2.20 23.94,100.28 21.49,100.28 16.16,94.95 13.93,94.95 LED19.G 12.86,95.96
COL21
  Top 0.254: IC2.21 24.13,99.77 21.75,99.77 15.12,93.14 12.66,93.14 11.75,94.05 LED19.R
COL22  (via drill 0.36)
  Top 0.254: IC2.22 24.33,99.26 22,99.26 14.89,92.15 14.59,91.85 11.46,91.85 10.98,91.85 v10.34,92.48
  Bottom 0.254: LED22.B 10.43,91.76 arc90 v10.34,92.48
COL23
  Top 0.254: IC2.23 24.53,98.76 22.51,98.76 13.37,89.61 10.93,89.61 10.55,89.99 9.98,89.99 LED22.G 10.07,90.37
COL24
  Top 0.254: IC2.24 24.73,98.25 22.76,98.25 12.07,87.55 8.98,87.55 LED22.R
COL25  (via drill 0.36)
  Top 0.254: IC3.1 10.67,68.68 8.79,70.56 8.79,85.98 8.21,86.56 7.63,86.56 v7.45,86.74
  Bottom 0.254: LED2.B 7.59,85.95 arc90 v7.45,86.74
COL26
  Top 0.254: IC3.2 10.17,68.42 8.29,70.31 8.29,83.97 7.91,84.35 7.05,84.35 LED2.G
COL27
  Top 0.254: IC3.3 9.67,68.16 7.78,70.05 7.78,81.18 7.04,81.92 6.19,81.92 LED2.R
COL28  (via drill 0.36)
  Top 0.254: IC3.4 9.17,67.9 7.27,69.8 7.27,78.97 7.27,79.4 6.15,80.52 5.29,80.52 v5.16,80.65
  Bottom 0.254: LED5.B 5.46,79.85 v5.16,80.65
COL29
  Top 0.254: IC3.5 8.67,67.64 6.76,69.55 6.76,77.44 6,78.21 4.96,78.21 LED5.G
COL30
  Top 0.254: IC3.6 8.17,67.37 6.25,69.29 6.25,74.8 5.26,75.79 4.25,75.79 LED5.R
COL31  (via drill 0.36)
  Top 0.254: IC3.7 7.67,67.11 5.75,69.04 5.75,72.92 5.75,73.36 4.83,74.27 3.64,74.27 v3.51,74.4
  Bottom 0.254: LED8.B 4.04,73.56 v3.51,74.4
COL32
  Top 0.254: IC3.8 7.17,66.85 5.24,68.78 5.24,71.43 4.55,72.11 3.32,72.11 LED8.G
COL33
  Top 0.254: IC3.9 6.03,63.68 5.49,64.21 5.49,67.01 2.85,69.65 LED8.R
COL34  (via drill 0.36)
  Top 0.254: IC3.10 6.4,63.2 5.75,63.2 4.98,63.96 4.98,66.07 4.98,66.52 3.69,67.82 2.72,67.82 v2.55,68
  Bottom 0.254: LED11.B 2.75,67.13 v2.55,68
COL35
  Top 0.254: LED11.G 2.44,65.48 3.71,65.48 4.48,64.72 4.48,63.7 5.5,62.68 IC3.11
COL36
  Top 0.254: IC3.12 2.95,62.18 2.29,62.84 LED11.R
COL37  (via drill 0.36)
  Top 0.254: IC3.13 2.95,61.67 2.39,61.67 v2.24,61.52
  Bottom 0.254: LED14.B 2.25,60.85 v2.24,61.52
COL38
  Top 0.254: 6.42,61.16 IC3.14 4.43,61.18 LED14.G
COL39
  Top 0.254: IC3.15 5.26,60.68 4.73,60.15 4.73,57.43 4.25,56.95 2.57,56.95 LED14.R
COL40  (via drill 0.36)
  Top 0.254: IC3.16 6.42,57.77 6.42,57.39 4.32,55.3 4.07,55.04 v2.62,55.04
  Bottom 0.254: LED17.B 2.72,54.43 v2.62,55.04
COL41
  Top 0.254: IC3.17 7.17,57 5.24,55.07 5.24,53.98 4.45,53.19 3.18,53.19 LED17.G 3.13,52.78
COL42
  Top 0.254: IC3.18 7.67,56.74 5.75,54.81 5.75,51.38 5.06,50.7 3.62,50.7 LED17.R
COL43  (via drill 0.36)
  Top 0.254: IC3.19 8.17,56.48 6.25,54.56 6.25,50.24 4.65,48.64 v3.69,48.64
  Bottom 0.254: LED20.B 3.87,48.39 v3.69,48.64
COL44
  Top 0.254: IC3.20 8.67,56.21 6.76,54.31 6.76,47.45 4.68,46.69 LED20.G
COL45
  Top 0.254: IC3.21 9.17,55.95 7.27,54.05 7.27,45.26 6.61,44.6 LED20.R
COL46  (via drill 0.36)
  Top 0.254: IC3.22 9.67,55.69 7.78,53.8 7.78,43.64 6.53,42.39 v5.42,42.39
  Bottom 0.254: LED23.B v5.42,42.39
COL47
  Top 0.254: IC3.23 10.17,55.43 8.29,53.54 8.29,41.1 LED23.G 6.73,40.59
COL48
  Top 0.254: IC3.24 10.67,55.17 8.79,53.29 8.79,38.99 8.24,38.43 7.47,38.43 LED23.R
COL49  (via drill 0.36)
  Top 0.254: IC4.1 24.48,26.11 21.49,26.11 13.87,33.73 12.35,33.73 9.66,36.42 7.85,36.42 v7.78,36.35
  Bottom 0.254: LED3.B 8.26,35.72 v7.78,36.35
COL50
  Top 0.254: IC4.2 24.28,25.6 21.24,25.6 13.62,33.22 12.1,33.22 10.34,34.98 9.56,34.98 9.02,34.44 LED3.G
COL51
  Top 0.254: IC4.3 24.08,25.1 20.99,25.1 13.49,32.59 10.95,32.59 10.53,32.16 LED3.R
COL52  (via drill 0.36)
  Top 0.254: IC4.4 23.88,24.59 20.73,24.59 14.56,30.76 14.38,30.94 11.54,30.94 11.13,30.94 v10.78,30.58
  Bottom 0.254: v10.78,30.58 11.36,29.87 LED6.B
COL53
  Top 0.254: IC4.5 23.68,24.08 20.48,24.08 14.89,29.67 13.06,29.67 12.19,28.79 LED6.G
COL54
  Top 0.254: IC4.6 23.48,23.57 20.22,23.57 16.36,27.43 14.33,27.43 13.55,26.65 LED6.R
COL55  (via drill 0.36)
  Top 0.254: IC4.7 23.28,23.06 19.97,23.06 17.81,25.22 17,26.04 15.17,26.04 v14.33,25.2
  Bottom 0.254: LED9.B 14.87,24.55 v14.33,25.2
COL56
  Top 0.254: IC4.8 23.08,22.56 19.72,22.56 17.94,24.33 16.92,24.33 15.86,23.27 LED9.G
COL57
  Top 0.254: IC4.9 22.78,21.79 17.18,21.79 17.23,21.74 LED9.R
COL58  (via drill 0.36)
  Top 0.254: IC4.10 24.81,19 23.53,19 21.55,20.98 19.49,20.98 18.7,20.19 v18.42,20.19
  Bottom 0.254: LED12.B v18.42,20.19
COL59
  Top 0.254: IC4.11 25.01,18.49 23.27,18.49 22,19.76 21.04,19.76 19.92,18.64 LED12.G 20.16,18.43
COL60
  Top 0.254: IC4.12 25,17.78 22.54,17.78 arc90 22.21,17.45 22.21,17.33 arc-90 LED12.R
COL61  (via drill 0.36)
  Top 0.254: IC4.13 23.55,15.62 v23.07,15.62
  Bottom 0.254: LED15.B 23.68,15.95 v23.07,15.62
COL62
  Top 0.254: IC4.14 25.56,16.92 25.56,15.19 24.91,14.54 LED15.G
COL63
  Top 0.254: IC4.15 26.07,16.72 26.07,16.21 27.49,14.78 27.49,13.39 26.75,12.65 LED15.R
COL64  (via drill 0.36)
  Top 0.254: IC4.16 26.83,16.78 26.83,16.21 28.63,14.4 28.86,14.17 28.86,12.65 28.86,12.29 v28.15,11.58
  Bottom 0.254: LED18.B 28.67,11.08 v28.15,11.58
COL65
  Top 0.254: IC4.17 29.88,15.76 29.88,13.16 30.89,12.14 30.89,11.38 30.13,10.62 LED18.G
COL66
  Top 0.254: IC4.18 30.38,15.96 30.38,13.41 32.77,11.02 32.77,10.16 32.02,9.4 LED18.R
COL67  (via drill 0.36)
  Top 0.254: IC4.19 30.89,16.16 30.89,13.67 34.19,10.36 34.19,8.74 v33.56,8.1
  Bottom 0.254: LED21.B 34.1,7.67 v33.56,8.1
COL68
  Top 0.254: IC4.20 31.4,16.36 31.4,13.92 36.48,8.84 36.48,8.33 35.72,7.57 LED21.G
COL69
  Top 0.254: IC4.21 31.91,16.56 31.91,14.17 38.36,7.72 38.36,6.99 37.72,6.35 LED21.R
COL70  (via drill 0.36)
  Top 0.254: IC4.22 32.42,16.76 32.42,14.43 39.66,7.19 39.71,7.14 39.71,5.89 39.71,5.54 v39.35,5.18
  Bottom 0.254: LED24.B 39.66,5.33 v39.35,5.18
COL71
  Top 0.254: IC4.23 32.92,16.96 32.92,14.68 40.8,6.81 41.31,6.81 42.07,6.05 42.07,5.54 41.62,5.09 LED24.G
COL72
  Top 0.254: IC4.24 33.43,17.16 33.43,14.94 41.05,7.32 42.42,7.32 44.43,5.31 LED24.R
COL73
  Bottom 0.254: IC9.2 95.94,106.82 95.94,108.59 90.1,114.43 89.85,114.43 87.31,116.97 86.59,116.97 85.4,118.16 85.4,119.31 LED25.G
COL74  (via drill 0.36)
  Top 0.254: LED26.B arc90 90.15,117.26 90.15,118.11 v90.02,118.24
  Bottom 0.254: IC9.4 96.96,107.22 96.96,109.09 90.94,115.09 89.64,116.38 89.64,117.6 89.64,117.86 v90.02,118.24
COL75
  Bottom 0.254: IC9.5 97.47,107.41 97.47,109.35 91.29,115.52 91.29,116.15 91.93,116.79 LED26.G
COL76  (via drill 0.36)
  Top 0.254: LED27.B 96.51,114.36 v95.76,115.27
  Bottom 0.254: IC9.7 98.48,107.81 98.48,110.11 95.69,112.9 95.26,113.34 95.26,114.76 v95.76,115.27
COL77
  Bottom 0.254: IC9.8 98.99,108.01 98.99,110.36 96.96,112.4 96.96,113.06 97.11,113.21 97.11,113.67 LED27.G
COL78  (via drill 0.36)
  Top 0.254: 101.87,110.88 LED28.B 101.66,111.2 v101.17,111.68 101.02,110.03
  Bottom 0.254: IC9.10 102.8,106.54 102.8,107.06 101.02,108.84 100.46,109.4 100.46,110.31 100.46,110.97 v101.17,111.68
COL79
  Bottom 0.254: IC9.11 103.31,106.34 103.31,107.32 102.04,108.59 102.04,109.09 103.1,110.16 LED28.G
COL80  (via drill 0.36)
  Top 0.254: LED29.B v106.2,107.57
  Bottom 0.254: IC9.13 105.69,107.32 v106.2,107.57
COL81
  Bottom 0.254: IC9.14 104.55,105.46 106.71,105.46 107.36,106.11 LED29.G
COL82
  Bottom 0.254: IC9.17 105.27,101.73 107.88,101.73 109.4,100.2 111.18,100.2 112.08,101.1 LED30.G
COL83  (via drill 0.36)
  Top 0.254: LED31.B 115.02,97.41 v114.79,97.82
  Bottom 0.254: IC9.19 104.88,100.71 107.37,100.71 110.67,97.41 111.16,96.93 113.34,96.93 113.9,96.93 v114.79,97.82
COL84
  Bottom 0.254: IC9.20 104.68,100.2 107.12,100.2 112.45,94.87 114.68,94.87 LED31.G 115.75,95.89
COL85
  Bottom 0.254: IC9.23 104.08,98.68 106.1,98.68 115.25,89.54 117.68,89.54 118.07,89.92 118.63,89.92 LED32.G 118.55,90.29
COL86  (via drill 0.36)
  Top 0.254: LED32.B 118.18,91.68 arc-90 v118.27,92.41
  Bottom 0.254: IC9.22 104.28,99.19 106.61,99.19 113.72,92.08 114.03,91.77 117.15,91.77 117.63,91.77 v118.27,92.41
COL87  (via drill 0.36)
  Top 0.254: LED30.B 111.11,102.31 v110.72,102.92
  Bottom 0.254: IC9.16 104.51,104.01 105.85,104.01 107.37,102.49 108.26,102.49 108.82,101.93 110.01,101.93 110.72,102.64 v110.72,102.92
COL88  (via drill 0.36)
  Top 0.305: LED25.B 84.51,120.07 v83.98,120.6
  Bottom 0.254: IC9.1 95.43,106.62 95.43,108.33 89.85,113.92 89.59,113.92 87.05,116.46 85.78,116.46 85.5,116.46 84.26,117.7 84.26,120.04 83.98,120.32 v83.98,120.6
COL89
  Bottom 0.254: IC9.3 96.45,107.02 96.45,108.84 90.35,114.94 90.1,114.94 88.32,116.71 88.32,118.75 LED25.R
COL90
  Bottom 0.254: IC9.6 97.97,107.61 97.97,109.6 93.53,114.05 93.53,114.96 94.21,115.64 LED26.R
COL91
  Bottom 0.254: IC9.9 102.29,106.74 102.29,106.81 99.75,109.35 99.75,112.4 LED27.R
COL92
  Bottom 0.254: IC9.12 103.89,106.22 103.89,107.83 LED28.R
COL93
  Bottom 0.254: IC9.15 104.57,104.78 105.85,104.78 106.86,103.76 108.57,103.76 109.11,104.3 LED29.R
COL94
  Bottom 0.254: IC9.18 105.08,101.22 107.63,101.22 110.62,98.22 112.3,98.22 113.41,99.33 LED30.R
COL95
  Bottom 0.254: IC9.21 104.48,99.7 106.86,99.7 113.49,93.07 115.96,93.07 116.87,93.97 LED31.R
COL96
  Bottom 0.254: IC9.24 103.88,98.17 105.85,98.17 116.54,87.48 119.63,87.48 LED32.R
COL97
  Bottom 0.254: IC12.3 118.94,68.08 120.83,69.98 120.83,81.1 121.57,81.84 122.42,81.84 LED33.R
COL98  (via drill 0.36)
  Top 0.254: LED33.B 121.02,85.87 arc-90 v121.16,86.67
  Bottom 0.254: IC12.1 117.94,68.61 119.82,70.49 119.82,85.9 120.4,86.49 120.99,86.49 v121.16,86.67
COL99
  Bottom 0.254: IC12.2 118.44,68.35 120.33,70.23 120.33,83.9 120.71,84.28 121.56,84.28 LED33.G
COL100  (via drill 0.36)
  Top 0.254: LED34.B 123.15,79.77 v123.45,80.57
  Bottom 0.254: IC12.4 119.44,67.82 121.34,69.72 121.34,78.89 121.34,79.32 122.46,80.44 123.32,80.44 v123.45,80.57
COL101
  Bottom 0.254: IC12.5 119.94,67.56 121.85,69.47 121.85,77.37 122.61,78.13 123.65,78.13 LED34.G
COL102
  Bottom 0.254: IC12.6 120.44,67.3 122.36,69.22 122.36,74.73 123.35,75.72 124.37,75.72 LED34.R
COL103  (via drill 0.36)
  Top 0.254: LED35.B 124.57,73.48 v125.1,74.32
  Bottom 0.254: IC12.7 120.94,67.04 122.87,68.96 122.87,72.85 122.87,73.28 123.78,74.19 124.97,74.19 v125.1,74.32
COL104
  Bottom 0.254: IC12.8 121.44,66.77 123.37,68.71 123.37,71.35 124.06,72.03 125.29,72.03 LED35.G
COL105
  Bottom 0.254: IC12.9 122.58,63.6 123.12,64.14 123.12,66.93 125.76,69.57 LED35.R
COL106  (via drill 0.36)
  Top 0.254: LED36.B 125.86,67.06 v126.07,67.92
  Bottom 0.254: IC12.10 122.21,63.12 122.87,63.12 123.63,63.88 123.63,65.99 123.63,66.45 124.92,67.74 125.89,67.74 v126.07,67.92
COL107
  Bottom 0.254: LED36.G 126.17,65.41 124.9,65.41 124.14,64.64 124.14,63.63 123.11,62.6 IC12.11
COL108
  Bottom 0.254: IC12.12 125.66,62.1 126.32,62.77 LED36.R
COL109  (via drill 0.36)
  Top 0.254: LED37.B 126.36,60.78 v126.37,61.44
  Bottom 0.254: IC12.13 125.66,61.6 126.22,61.6 v126.37,61.44
COL110
  Bottom 0.254: IC12.14 124.18,61.1 LED37.G
COL111
  Bottom 0.254: IC12.15 123.35,60.6 123.88,60.07 123.88,57.35 124.36,56.87 126.04,56.87 LED37.R
COL112  (via drill 0.36)
  Top 0.254: LED38.B 125.89,54.35 v125.99,54.97
  Bottom 0.254: IC12.16 122.19,57.7 122.19,57.32 124.29,55.22 124.54,54.97 v125.99,54.97
COL113
  Bottom 0.254: IC12.17 121.44,56.92 123.37,54.99 123.37,53.9 124.16,53.11 125.43,53.11 LED38.G 125.48,52.71
COL114
  Bottom 0.254: IC12.18 120.94,56.66 122.87,54.74 122.87,51.31 123.55,50.62 124.99,50.62 LED38.R
COL115  (via drill 0.36)
  Top 0.254: LED39.B 124.75,48.31 v124.92,48.57
  Bottom 0.254: IC12.19 120.44,56.4 122.36,54.48 122.36,50.17 123.96,48.57 v124.92,48.57
COL116
  Bottom 0.254: IC12.20 119.94,56.14 121.85,54.23 121.85,47.37 123.93,46.61 LED39.G
COL117
  Bottom 0.254: IC12.21 119.44,55.88 121.34,53.98 121.34,45.19 122,44.53 LED39.R
COL118  (via drill 0.36)
  Top 0.254: LED40.B v123.2,42.32
  Bottom 0.254: IC12.22 118.94,55.61 120.83,53.72 120.83,43.56 122.08,42.32 v123.2,42.32
COL119
  Bottom 0.254: IC12.23 118.44,55.35 120.33,53.47 120.33,41.02 LED40.G 121.89,40.51
COL120
  Bottom 0.254: IC12.24 117.94,55.09 119.82,53.21 119.82,38.91 120.38,38.35 121.14,38.35 LED40.R
COL121  (via drill 0.36)
  Top 0.254: LED41.B 120.35,35.65 v120.83,36.27
  Bottom 0.254: IC13.1 104.13,26.04 107.12,26.04 114.74,33.66 116.26,33.66 118.95,36.35 120.76,36.35 v120.83,36.27
COL122
  Bottom 0.254: IC13.2 104.33,25.53 107.37,25.53 114.99,33.15 116.52,33.15 118.27,34.9 119.06,34.9 119.59,34.36 LED41.G
COL123  (via drill 0.36)
  Top 0.254: v117.84,30.51 117.25,29.79 LED42.B
  Bottom 0.254: IC13.4 104.73,24.51 107.88,24.51 114.05,30.68 114.23,30.86 117.07,30.86 117.48,30.86 v117.84,30.51
COL124
  Bottom 0.254: IC13.3 104.53,25.02 107.63,25.02 115.12,32.51 117.66,32.51 118.08,32.09 LED41.R
COL125
  Bottom 0.254: IC13.5 104.93,24 108.13,24 113.72,29.59 115.55,29.59 116.42,28.72 LED42.G
COL126
  Bottom 0.254: IC13.6 105.13,23.5 108.39,23.5 112.25,27.36 114.28,27.36 115.06,26.57 LED42.R
COL127  (via drill 0.36)
  Top 0.254: LED43.B 113.75,24.47 v114.28,25.12
  Bottom 0.254: IC13.7 105.33,22.99 108.64,22.99 110.8,25.15 111.61,25.96 113.44,25.96 v114.28,25.12
COL128
  Bottom 0.254: IC13.8 105.53,22.48 108.9,22.48 110.67,24.26 111.69,24.26 112.75,23.19 LED43.G
COL129
  Bottom 0.254: IC13.9 105.83,21.72 111.44,21.72 111.38,21.66 LED43.R
COL130  (via drill 0.36)
  Top 0.254: LED44.B v110.19,20.12
  Bottom 0.254: IC13.10 103.81,18.92 105.09,18.92 107.07,20.9 109.12,20.9 109.91,20.12 v110.19,20.12
COL131
  Bottom 0.254: IC13.11 103.61,18.42 105.34,18.42 106.61,19.69 107.58,19.69 108.69,18.57 LED44.G 108.45,18.35
COL132
  Bottom 0.254: IC13.12 103.61,17.7 106.08,17.7 arc-90 106.41,17.37 106.41,17.25 arc90 LED44.R
COL133  (via drill 0.36)
  Top 0.254: LED45.B 104.93,15.88 v105.54,15.55
  Bottom 0.254: IC13.13 105.06,15.55 v105.54,15.55
COL134
  Bottom 0.254: IC13.14 103.05,16.85 103.05,15.11 103.7,14.47 LED45.G
COL135
  Bottom 0.254: IC13.15 102.55,16.65 102.55,16.13 101.12,14.71 101.12,13.31 101.86,12.57 LED45.R
COL136  (via drill 0.36)
  Top 0.254: LED46.B 99.94,11.01 v100.46,11.51
  Bottom 0.254: IC13.16 101.78,16.7 101.78,16.13 99.98,14.33 99.75,14.1 99.75,12.57 99.75,12.22 v100.46,11.51
COL137
  Bottom 0.254: IC13.17 98.74,15.69 98.74,13.08 97.72,12.07 97.72,11.3 98.48,10.54 LED46.G
COL138
  Bottom 0.254: IC13.18 98.23,15.89 98.23,13.34 95.84,10.95 95.84,10.08 96.6,9.33 LED46.R
COL139  (via drill 0.36)
  Top 0.254: LED47.B 94.52,7.59 v95.05,8.03
  Bottom 0.254: IC13.19 97.72,16.08 97.72,13.59 94.42,10.29 94.42,8.66 v95.05,8.03
COL140
  Bottom 0.254: IC13.20 97.21,16.28 97.21,13.84 92.13,8.76 92.13,8.26 92.89,7.5 LED47.G
COL141
  Bottom 0.254: IC13.21 96.7,16.48 96.7,14.1 90.25,7.65 90.25,6.91 90.89,6.27 LED47.R
COL142  (via drill 0.36)
  Top 0.254: LED48.B 88.96,5.25 v89.26,5.11
  Bottom 0.254: IC13.22 96.2,16.68 96.2,14.35 88.96,7.11 88.91,7.06 88.91,5.82 88.91,5.46 v89.26,5.11
COL143
  Bottom 0.254: IC13.23 95.69,16.88 95.69,14.61 87.81,6.73 87.31,6.73 86.54,5.97 86.54,5.46 86.99,5.02 LED48.G
COL144
  Bottom 0.254: IC13.24 95.18,17.08 95.18,14.86 87.56,7.24 86.19,7.24 84.18,5.23 LED48.R
D+  (via drill 0.36)
  Top 0.254: IC1.27 25.41,58.02 25.41,56.67 26.65,55.42 33.18,55.42 34.93,55.42 v35.16,55.65 | JP3.2 38.21,42.22 36.1,40.11 36.1,35.71 36.1,32.31 36.1,31.09 36.1,29.77 36.73,29.13 JP2.D+
  Bottom 0.254: v35.16,55.65 35.29,55.27 35.29,54.51 37.8,51.99 37.8,44.98 40.57,42.22 JP3.2
D+1  (via drill 0.36)
  Top 0.254: v93.45,55.58 93.33,55.19 93.33,54.43 90.81,51.92 90.81,44.91 88.04,42.14 JP6.2
  Bottom 0.254: IC16.27 103.21,57.94 103.21,56.59 101.96,55.35 95.43,55.35 93.68,55.35 v93.45,55.58 | JP6.2 90.4,42.14 92.51,40.03 92.51,35.64 92.51,32.23 92.51,31.01 92.51,29.69 91.88,29.06 JP5.D+
D-  (via drill 0.36)
  Top 0.254: IC1.26 24.57,56.59 26.3,54.86 32.85,54.86 36.23,54.86 v36.38,54.71 | JP3.3 38.82,43.49 35.64,40.31 35.64,35.46 35.64,32.11 35.64,30.61 35.64,29.39 36.68,28.35 38.46,28.35 JP2.D-
  Bottom 0.254: v36.38,54.71 38.16,54.71 38.94,53.92 38.94,52.48 38.94,45.47 40.93,43.49 JP3.3
D-1  (via drill 0.36)
  Top 0.254: v92.23,54.64 90.46,54.64 89.67,53.85 89.67,52.4 89.67,45.39 87.69,43.41 JP6.3
  Bottom 0.254: IC16.26 104.04,56.52 102.32,54.79 95.76,54.79 92.39,54.79 v92.23,54.64 | IC16.26 | JP6.3 89.8,43.41 92.97,40.23 92.97,35.38 92.97,32.03 92.97,30.53 92.97,29.31 91.93,28.27 90.15,28.27 JP5.D-
DAT  (via drill 0.36)
  Top 0.305: IC1.34 31.9,59.79 v30.03,59.79 | v23.6,64.14 23.6,62.99 v24.67,61.93
  Bottom 0.305: v30.03,59.79 26.8,59.79 v24.67,61.93 | JP1.2 16.57,74.02 17.46,73.13 17.46,71.12 23.6,64.97 v23.6,64.14
DAT1  (via drill 0.36)
  Top 0.305: v98.58,59.72 101.81,59.72 v103.94,61.85 | JP4.2 112.05,73.94 111.16,73.05 111.16,71.04 105.01,64.9 v105.01,64.06
  Bottom 0.305: IC16.34 v98.58,59.72 | v105.01,64.06 105.01,62.92 v103.94,61.85
DGND
  Top 0.305: X1.2 34.66,59.4 35.13,60 35.39,60.25 35.54,60.58 36.26,61.38 X1.4
DGND1
  Bottom 0.305: X2.2 93.95,59.32 93.48,59.92 93.22,60.17 93.07,60.5 92.35,61.3 X2.4
GND  (via drill 0.36)
  Top 0.254: v30.23,100.97 30.05,100.97 IC2.29 | 23.04,50.83 23.04,50.26 arc-90 IC5.9
  Top 0.305: 34.88,103.78 GND.2
  Top 0.406: R19.2 33.32,27.95 34.19,27.08
  Top 0.61: v23.27,48.79 22.99,49.07 22.99,49.5 23.04,49.56 23.04,50.83
  Top 2.54: 34.88,103.78 34.88,101.09 | 42.2,114.02 44.86,114.02
  Bottom 0.305: 34.88,103.76 GND.2
  Bottom 2.54: 34.88,103.76 34.88,101.07 | 42.2,114.02 44.86,114.02
  other vias: 16.8,58.14 15.37,62.86 22.46,48.82 24.09,48.79 22.46,48.03 23.27,48.03 24.09,48.03 44.3,115.16 37.57,67.92 30.23,63.14 24.59,67.72 31.07,58.27 26.88,56.49 33.18,18.97 37.4,21.06 29.37,40.34 27.08,67.77 27.08,65.48 27.59,60.66 38.54,31.93 43.64,13.59 43.08,8.61 45.37,117.55 41.31,115.01 31.32,103.73 30.28,97.61 22.08,59.77 33.03,38.4 30.44,52.78 34.98,52.78 19.03,56.18 21.01,57.35 30.99,27 30.61,23.67 29.9,67.56 31.73,68.76 24.44,91.69 26.68,89.26 28.4,87.38 30.31,87.68 28.78,84.94 27.26,86.46 34.86,86.23 32.77,84.25 28.53,82.58 22.87,82.8 21.29,84.2 32.98,100.2 25.3,49.86 25.3,49.17 25.3,48.49 25.3,47.78 21.24,47.78 21.24,48.49 21.24,49.17 21.24,49.86 23.02,50.93 45.62,8.59 45.55,5.28 14.71,57.71 14.15,62.31 26.5,63.47 30.61,62.18 24.7,71.02 31.83,56.03 33.64,54.25 33.84,56.03 40.9,55.07
  pour Top: 47.86,124.76 47.73,124.76 47.73,94.72 37.6,94.59 37.6,79.45 47.73,79.58 47.86,-1.42 -2.05,-1.4 -2.05,124.79
  pour Bottom: -3.65,127.2 -3.65,-5.41 48.29,-5.28 48.29,79.43 37.6,79.5 37.6,94.41 48.47,94.49 48.47,95.15 48.65,127.33 48.29,127.33
  pour Top (no thermals): 21.67,49.23 24.7,49.23 24.7,47.7 21.67,47.7
GND1  (via drill 0.36)
  Top 0.305: 93.73,103.68 GND1.2
  Top 2.54: 93.73,103.68 93.73,100.99 | 86.42,113.94 83.75,113.94
  Bottom 0.254: v98.38,100.89 98.56,100.89 IC9.29 | 105.57,50.75 105.57,50.18 arc90 IC10.9